# Altium PCB M_PCT.PcbDoc
Units mil, origin at the board's own origin, x right, y up, seen from the top; angles counter-clockwise.
Board outline 3510.03 x 3480.03 mil, 2 copper layers (Top Layer, Bottom Layer); 3 components, 11 nets, 12 pads, 50 vias.
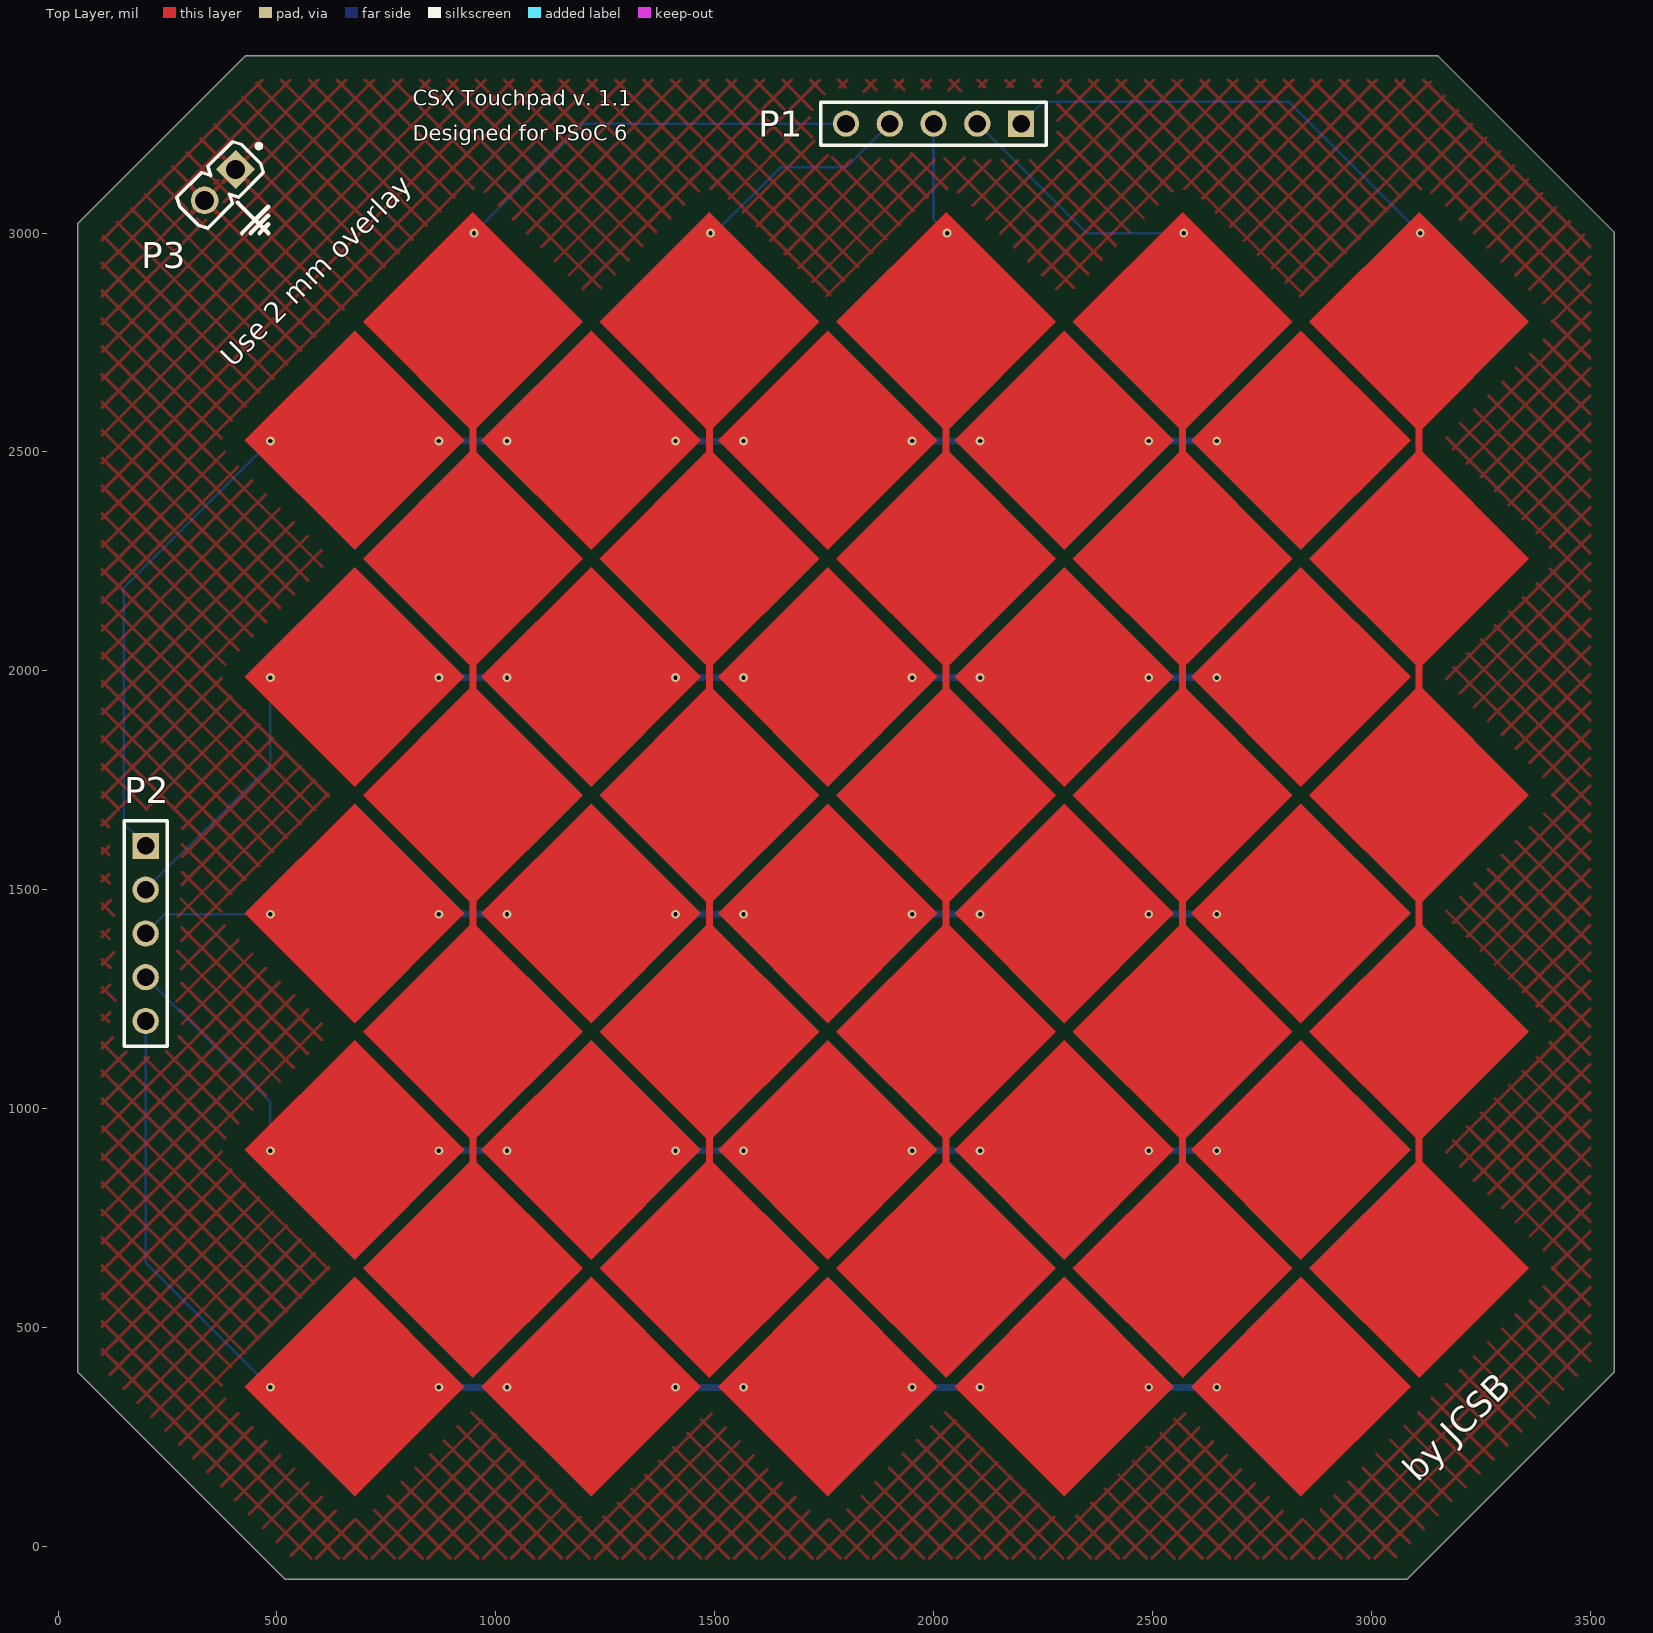
[diagram p0: Top Layer view]
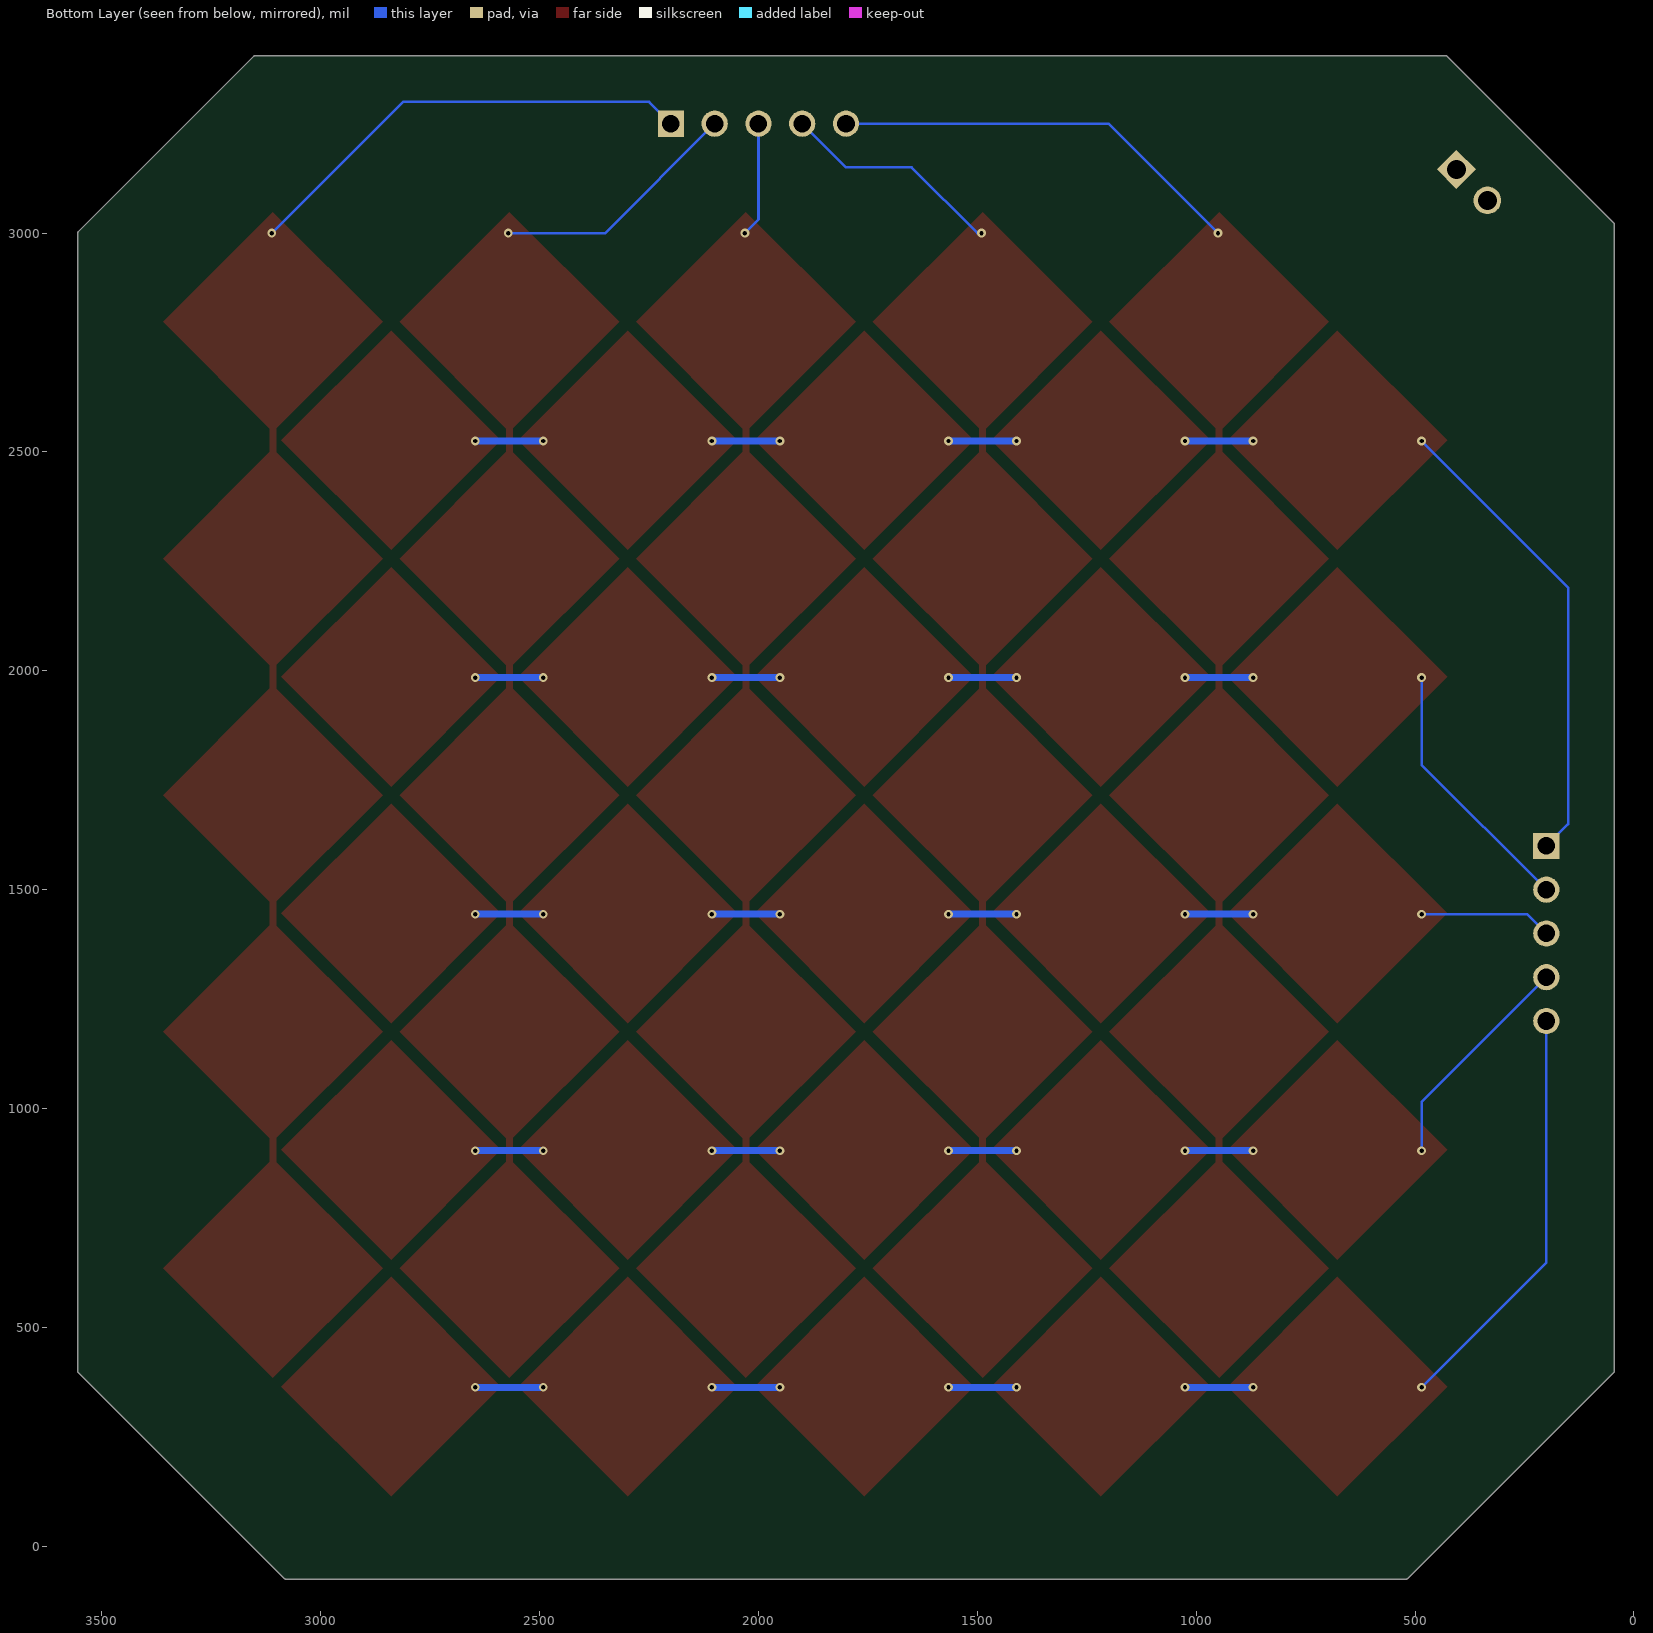
[diagram p1: Bottom Layer view, seen from below]
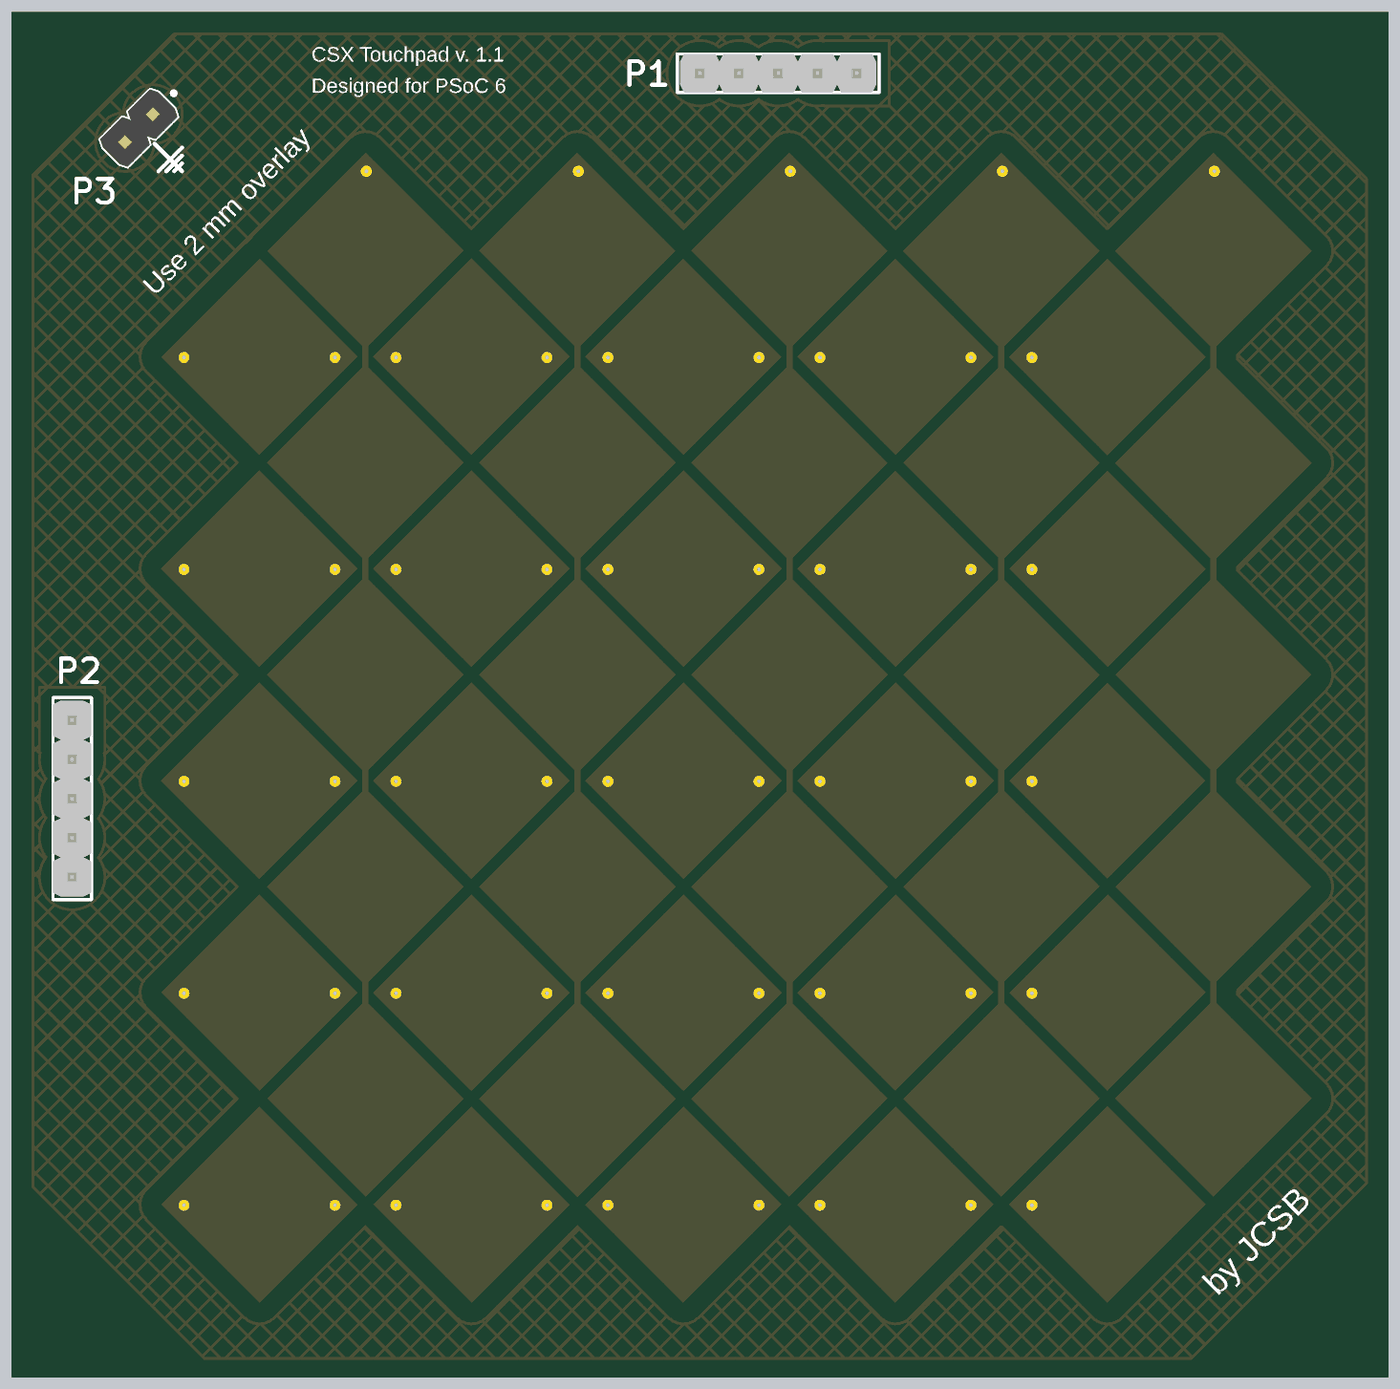
[diagram p2: 3D render of the assembled board from above, using the file's embedded part models]

## Layer stack, top to bottom
Top Solder: solder mask 0.4, Solder Resist, Dk 3.5
Top Layer: signal copper 1.4
Dielectric 1: dielectric 12.6, FR-4, Dk 4.8
Bottom Layer: signal copper 1.4
Bottom Solder: solder mask 0.4, Solder Resist, Dk 3.5

## Board outline
446.47,-3.56 cw(c450,0) 446.45,-3.55 516.45,-73.55 46.45,396.45 46.47,396.44 cw(c50,400) 44.99,400 44.99,3020 cw(c50,3020) 46.47,3023.56 46.45,3023.55 426.45,3403.55 426.44,3403.53 cw(c430,3400) 430,3405.01 3150,3405.02 cw(c3150,3400) 3153.56,3403.53 3153.55,3403.55 3553.55,3003.55 3553.53,3003.56 cw(c3550,3000) 3555.02,3000 3555.02,400 cw(c3550,400) 3553.53,396.44 3553.55,396.45 3083.55,-73.55 3083.56,-73.53 cw(c3080,-70) 3080,-75.02 520,-75.02 cw(c520,-70)

## Design rules (kind name [scope] priority, off if disabled: settings)
Clearance Clearance_1 [(InNet('GND') AND InPolygon)] p1: gap=50 ignorepadtopadclearanceinfootprint=FALSE
Clearance [All] p2: gap=10 ignorepadtopadclearanceinfootprint=FALSE except(0: Arc-Hole Track-Hole SMDPad-Hole THPad-Hole Via-Hole Fill-Hole Poly-Hole Region-Hole Text-Hole)
PolygonConnect [All] p1: connectstyle=Relief reliefconductorwidth=10 reliefentries=4 polygonreliefangle="90 Angle" airgapwidth=10
RoomDefinition electrodes [InComponentClass('electrodes')] p1: confinementstyle=ConfineOut formatcopy=TRUE lockcomponents=FALSE outline 3600,-10 3740,-10 3740,350 3600,350
RoutingVias [All] p1: holewidth=28 width=50 viastyle="Through Hole" minholewidth=10 minwidth=20 maxholewidth=28 maxwidth=50
SolderMaskExpansion [All] p1: expansion=4 istentingtop=FALSE
Width [All] p1: maxlimit=20 minlimit=4 preferedwidth=10 minimp=50.000000 maximp=50.000000 favimp=50.000000
30 further rules are at their usual default settings.

## Components (designator, comment, footprint, x,y, rotation, side; value= is the part's Value field where it differs from the comment)
P1 "MTLW-105-05-L-S-190" SMTC-MTLW-105-05-X-S-190 2200,3250 r180 top
P2 "MTLW-105-05-L-S-190" SMTC-MTLW-105-05-X-S-190 200,1600 r270 top
P3 "613 002 111 21" WE-61300211121_V 370,3110 r225 top

## Footprints (in the part's own frame and the unit in brackets; to place one, negate y for a bottom-side part, rotate by r counter-clockwise, add the part's x,y. Pads: shape width x height; smd on the part's side, far side on the other; paste and mask are expansions set on the pad)
SMTC-MTLW-105-05-X-S-190 [mm] "Terminal Assembly, 1x5 Pins, Vertical, 2.54mm Pitch, Male"
  rect 1.52x1.52 hole 1.02: 1(0,0)
  round 1.52 hole 1.02: 2(2.54,0) 3(5.08,0) 4(7.62,0) 5(10.16,0)
  silkscreen extent -1.46,-1.24 11.62,1.24, body extent -1.27,-1.24 11.43,1.24, height 6.35
WE-61300211121_V [mm] "Header, 2-Leads, Body 5.08x2.54mm, Pitch 2.54mm"
  rect 1.6x1.6 hole 1.1: 1(-1.27,0)
  round 1.6 hole 1.1: 2(1.27,0)
  silkscreen extent -3.31,-1.27 2.54,1.27, body extent -2.54,-1.27 2.54,1.27, height 8.54

## Part data
P1 P2: library part CMP-1024-00079-1, "Low Profile .025\" SQ Post Header, Through-hole, Vertical, -55 to 125 degC, 2.54 mm Pitch, 5-Pin, Male, RoHS", Manufacturer=Samtec, Temperature Range="-55 to 125 degC", ComponentLink1Description="Manufacturer URL", ComponentLink1URL=http://www.samtec.com, ComponentLink2Description=Datasheet, ComponentLink2URL=http://www.samtec.com/documents/webfiles/pdf/MTLW_TH.PDF, ComponentLink3Description="Package Specification", ComponentLink3URL=http://www.samtec.com/documents/webfiles/cpdf/MTLW-1XX-XX-XX-X-XXX-XX-XX-MKT1.pdf, DatasheetVersion=F-214, Mounting Technology=Through-hole, Orientation=Vertical, PackageDescription="Low Profile Terminal Assembly", PackageReference=MTLW-105-05-X-S-190, PackageVersion="T, 6/1991", PartNumber=MTLW-105-05-L-S-190, Pitch="2.54 mm", RoHS=True
P3: library part CMP-1712-00002-1, "Male Header, Pitch 2.54 mm, 1 x 2 Position, Height 8.54 mm, Tail Length 3 mm, -40 to 105 degC, RoHS, Bulk", Manufacturer="Wuerth Elektronik", ComponentLink1Description="Manufacturer URL", ComponentLink1URL=https://www.we-online.com/, ComponentLink2Description=Datasheet, ComponentLink2URL=http://katalog.we-online.de/em/datasheet/6130xx11121.pdf, DatasheetVersion="Rev. J", Mounting Technology="Through Hole", PackageDescription="Male Header, Pitch 2.54 mm, 1 x 2 Position, Height 8.54 mm, Tail Length 3 mm", PackageReference=61300211121, PartNumber="613 002 111 21"

## Via types
v1: diameter 20, hole 10, Top Layer to Bottom Layer, 50 vias

## Nets (pads, with @x,y where several pads share a name; then routed paths per layer and width w, separated by ;. In a path a pad name is that pad's centre, name@x,y a point inside that pad or via, vN(x,y) a via of type N, cw(c..) or ccw(c..) an arc to the next point about the centre after c; other vN are vias at no path point)
GND: P3.1 P3.2
NetP1_1: P1.1 | length 3207.9
  Top Layer w16: 3109.45,661.97 3109.45,2546.34 3109.45,2813.03
  Bottom Layer w6: P1.1 2250,3300 2811.89,3300 v1(3111.89,3000)
NetP1_2: P1.2 | length 2726
  Top Layer w16: 2568.98,661.97 2568.98,2546.34 2568.98,2813.03
  Bottom Layer w6: P1.2 2350,3000 v1(2571.42,3000)
NetP1_3: P1.3 | length 2177.9
  Top Layer w10: 2025,3035 2030,3030
  Top Layer w16: 2028.51,661.97 2028.51,2570
  Bottom Layer w6: P1.3 2000,3030.94 v1(2030.94,3000)
NetP1_4: P1.4 | length 2676.8
  Top Layer w16: 1490,660 1488.03,661.97 1488.03,2546.34 1488.03,2813.03 1495,2820
  Bottom Layer w6: v1(1490.47,3000) 1500,3000 1650,3150 1800,3150 P1.4
NetP1_5: P1.5 | length 3091.6
  Top Layer w16: 947.56,661.97 947.56,2546.34 947.56,2800
  Bottom Layer w6: v1(950,3000) 1200,3250 P1.5
NetP2_1: P2.1 | length 1706.4
  Bottom Layer w6: P2.1 150,1650 150,2190 v1(485,2525)
  Bottom Layer w16: v1(870,2525) v1(1025.47,2525) ; v1(1410.47,2525) v1(1565.94,2525) ; v1(1950.94,2525) v1(2106.42,2525) ; v1(2491.42,2525) v1(2646.89,2525)
NetP2_2: P2.2 | length 1224.5
  Bottom Layer w6: P2.2 485,1785 v1(485,1984.53)
  Bottom Layer w16: v1(870,1984.53) v1(1025.47,1984.53) ; v1(1410.47,1984.53) v1(1565.94,1984.53) ; v1(1950.94,1984.53) v1(2106.42,1984.53) ; v1(2491.42,1984.53) v1(2646.89,1984.53)
NetP2_3: P2.3 | length 925.1
  Bottom Layer w6: P2.3 244.06,1444.06 v1(485,1444.06)
  Bottom Layer w16: v1(870,1444.06) v1(1025.47,1444.06) ; v1(1410.47,1444.06) v1(1565.94,1444.06) ; v1(1950.94,1444.06) v1(2106.42,1444.06) ; v1(2491.42,1444.06) v1(2646.89,1444.06)
NetP2_4: P2.4 | length 1136.4
  Bottom Layer w6: P2.4 485,1015 v1(485,903.58)
  Bottom Layer w16: v1(870,903.58) v1(1025.47,903.58) ; v1(1410.47,903.58) v1(1565.94,903.58) ; v1(1950.94,903.58) v1(2106.42,903.58) ; v1(2491.42,903.58) v1(2646.89,903.58)
NetP2_5: P2.5 | length 1576.8
  Bottom Layer w6: P2.5 200,648.11 v1(485,363.11)
  Bottom Layer w16: v1(870,363.11) v1(1025.47,363.11) ; v1(1410.47,363.11) v1(1565.94,363.11) ; v1(1950.94,363.11) v1(2106.42,363.11) ; v1(2491.42,363.11) v1(2646.89,363.11)

## Polygon pours and split planes (outlines as drawn)
GND on Top Layer "Top Layer-GND" (hatched 45Degree grid 45 track 7, pour order 30): 100,2990 460,3350 3130,3350 3500,2980 3500,420 3052.49,-27.51 537.51,-27.51 100,410
no net on Top Layer "Top Layer-No Net" (solid, pour order 26): 4000,2200
no net on Top Layer "Top Layer-No Net 1" (solid, pour order 0): -100,2100

## Other copper
Top Layer:
  region net NetP2_5: 1468.35,364.76 1217.8,615.31 967.25,364.76 1217.8,114.21
  region net NetP2_5: 2008.82,364.76 1758.27,615.31 1507.72,364.76 1758.27,114.21
  region net NetP2_5: 2549.29,364.76 2298.74,615.31 2048.19,364.76 2298.74,114.21
  region net NetP2_5: 3089.76,364.76 2839.21,615.31 2588.66,364.76 2839.21,114.21
  region net NetP2_5: 927.87,364.76 677.32,615.31 426.77,364.76 677.32,114.21
  region net NetP2_2: 927.87,1986.18 677.32,2236.73 426.77,1986.18 677.32,1735.63
  region net NetP2_1: 927.87,2526.65 677.32,2777.2 426.77,2526.65 677.32,2276.1
  region net NetP2_3: 927.87,1445.71 677.32,1696.26 426.77,1445.71 677.32,1195.16
  region net NetP2_4: 927.87,905.24 677.32,1155.79 426.77,905.24 677.32,654.69
  region net NetP2_4: 3089.76,905.24 2839.21,1155.79 2588.66,905.24 2839.21,654.69
  region net NetP2_4: 2549.29,905.24 2298.74,1155.79 2048.19,905.24 2298.74,654.69
  region net NetP2_4: 2008.82,905.24 1758.27,1155.79 1507.72,905.24 1758.27,654.69
  region net NetP2_4: 1468.35,905.24 1217.8,1155.79 967.25,905.24 1217.8,654.69
  region net NetP2_3: 3089.76,1445.71 2839.21,1696.26 2588.66,1445.71 2839.21,1195.16
  region net NetP2_3: 2549.29,1445.71 2298.74,1696.26 2048.19,1445.71 2298.74,1195.16
  region net NetP2_3: 2008.82,1445.71 1758.27,1696.26 1507.72,1445.71 1758.27,1195.16
  region net NetP2_3: 1468.35,1445.71 1217.8,1696.26 967.25,1445.71 1217.8,1195.16
  region net NetP2_1: 1468.35,2526.65 1217.8,2777.2 967.25,2526.65 1217.8,2276.1
  region net NetP2_1: 2008.82,2526.65 1758.27,2777.2 1507.72,2526.65 1758.27,2276.1
  region net NetP2_1: 2549.29,2526.65 2298.74,2777.2 2048.19,2526.65 2298.74,2276.1
  region net NetP2_1: 3089.76,2526.65 2839.21,2777.2 2588.66,2526.65 2839.21,2276.1
  region net NetP1_1: 3360,2796.89 3109.45,3047.44 2858.9,2796.89 3109.45,2546.34
  region net NetP1_2: 2819.53,2796.89 2568.98,3047.44 2318.43,2796.89 2568.98,2546.34
  region net NetP1_3: 2279.06,2796.89 2028.51,3047.44 1777.96,2796.89 2028.51,2546.34
  region net NetP1_4: 1738.58,2796.89 1488.03,3047.44 1237.48,2796.89 1488.03,2546.34
  region net NetP1_5: 1198.11,2796.89 947.56,3047.44 697.01,2796.89 947.56,2546.34
  region net NetP1_1: 3360,2256.42 3109.45,2506.97 2858.9,2256.42 3109.45,2005.87
  region net NetP1_2: 2819.53,2256.42 2568.98,2506.97 2318.43,2256.42 2568.98,2005.87
  region net NetP1_3: 2279.06,2256.42 2028.51,2506.97 1777.96,2256.42 2028.51,2005.87
  region net NetP1_4: 1738.58,2256.42 1488.03,2506.97 1237.48,2256.42 1488.03,2005.87
  region net NetP1_5: 1198.11,2256.42 947.56,2506.97 697.01,2256.42 947.56,2005.87
  region net NetP2_2: 3089.76,1986.18 2839.21,2236.73 2588.66,1986.18 2839.21,1735.63
  region net NetP2_2: 2549.29,1986.18 2298.74,2236.73 2048.19,1986.18 2298.74,1735.63
  region net NetP2_2: 2008.82,1986.18 1758.27,2236.73 1507.72,1986.18 1758.27,1735.63
  region net NetP2_2: 1468.35,1986.18 1217.8,2236.73 967.25,1986.18 1217.8,1735.63
  region net NetP1_5: 1198.11,1715.94 947.56,1966.49 697.01,1715.94 947.56,1465.4
  region net NetP1_4: 1738.58,1715.94 1488.03,1966.49 1237.48,1715.94 1488.03,1465.4
  region net NetP1_3: 2279.06,1715.94 2028.51,1966.49 1777.96,1715.94 2028.51,1465.4
  region net NetP1_2: 2819.53,1715.94 2568.98,1966.49 2318.43,1715.94 2568.98,1465.4
  region net NetP1_1: 3360,1715.94 3109.45,1966.49 2858.9,1715.94 3109.45,1465.4
  region net NetP1_5: 1198.11,1175.47 947.56,1426.02 697.01,1175.47 947.56,924.92
  region net NetP1_4: 1738.58,1175.47 1488.03,1426.02 1237.48,1175.47 1488.03,924.92
  region net NetP1_3: 2279.06,1175.47 2028.51,1426.02 1777.96,1175.47 2028.51,924.92
  region net NetP1_2: 2819.53,1175.47 2568.98,1426.02 2318.43,1175.47 2568.98,924.92
  region net NetP1_1: 3360,1175.47 3109.45,1426.02 2858.9,1175.47 3109.45,924.92
  region net NetP1_5: 1198.11,635 947.56,885.55 697.01,635 947.56,384.45
  region net NetP1_4: 1738.58,635 1488.03,885.55 1237.48,635 1488.03,384.45
  region net NetP1_3: 2279.06,635 2028.51,885.55 1777.96,635 2028.51,384.45
  region net NetP1_2: 2819.53,635 2568.98,885.55 2318.43,635 2568.98,384.45
  region net NetP1_1: 3360,635 3109.45,885.55 2858.9,635 3109.45,384.45

## Silkscreen, mask and mechanical layers (free items; w line width, h text height)
Top Overlay:
  lines w10: 410,3070 480,3000 ; 420,3000 480,3060 ; 440,3000 480,3040 ; 460,3000 480,3020
  text "CSX Touchpad v. 1.1" at 810,3280 h60
  text "Designed for PSoC 6" at 810,3200 h60
  text "Use 2 mm overlay" at 410,2680 h80 r45
  text "by JCSB" at 3120,130 h100 r45
Mechanical 1:
  lines w10: 450,0 50,400 ; 3150,0 3550,400 ; 50,400 520,-70 3080,-70 3550,400 ; 50,400 50,3020 430,3400 3150,3400 ; 3150,3400 3550,3000 ; 3150,3400 3550,3000 ; 3550,400 3550,3000